# Altium PCB Mega2560PCB.PcbDoc (part 1 of 2)
Units mil, origin at the board's own origin, x right, y up, seen from the top; angles counter-clockwise.
Board outline 3543.31 x 2165.35 mil, 4 copper layers (Top Layer, GND02, PWR03, Bottom Layer), stack 23.756 mil thick; 55 components, 99 nets, 321 pads, 155 vias.
Unrouted connection lines stored in the file: 47.
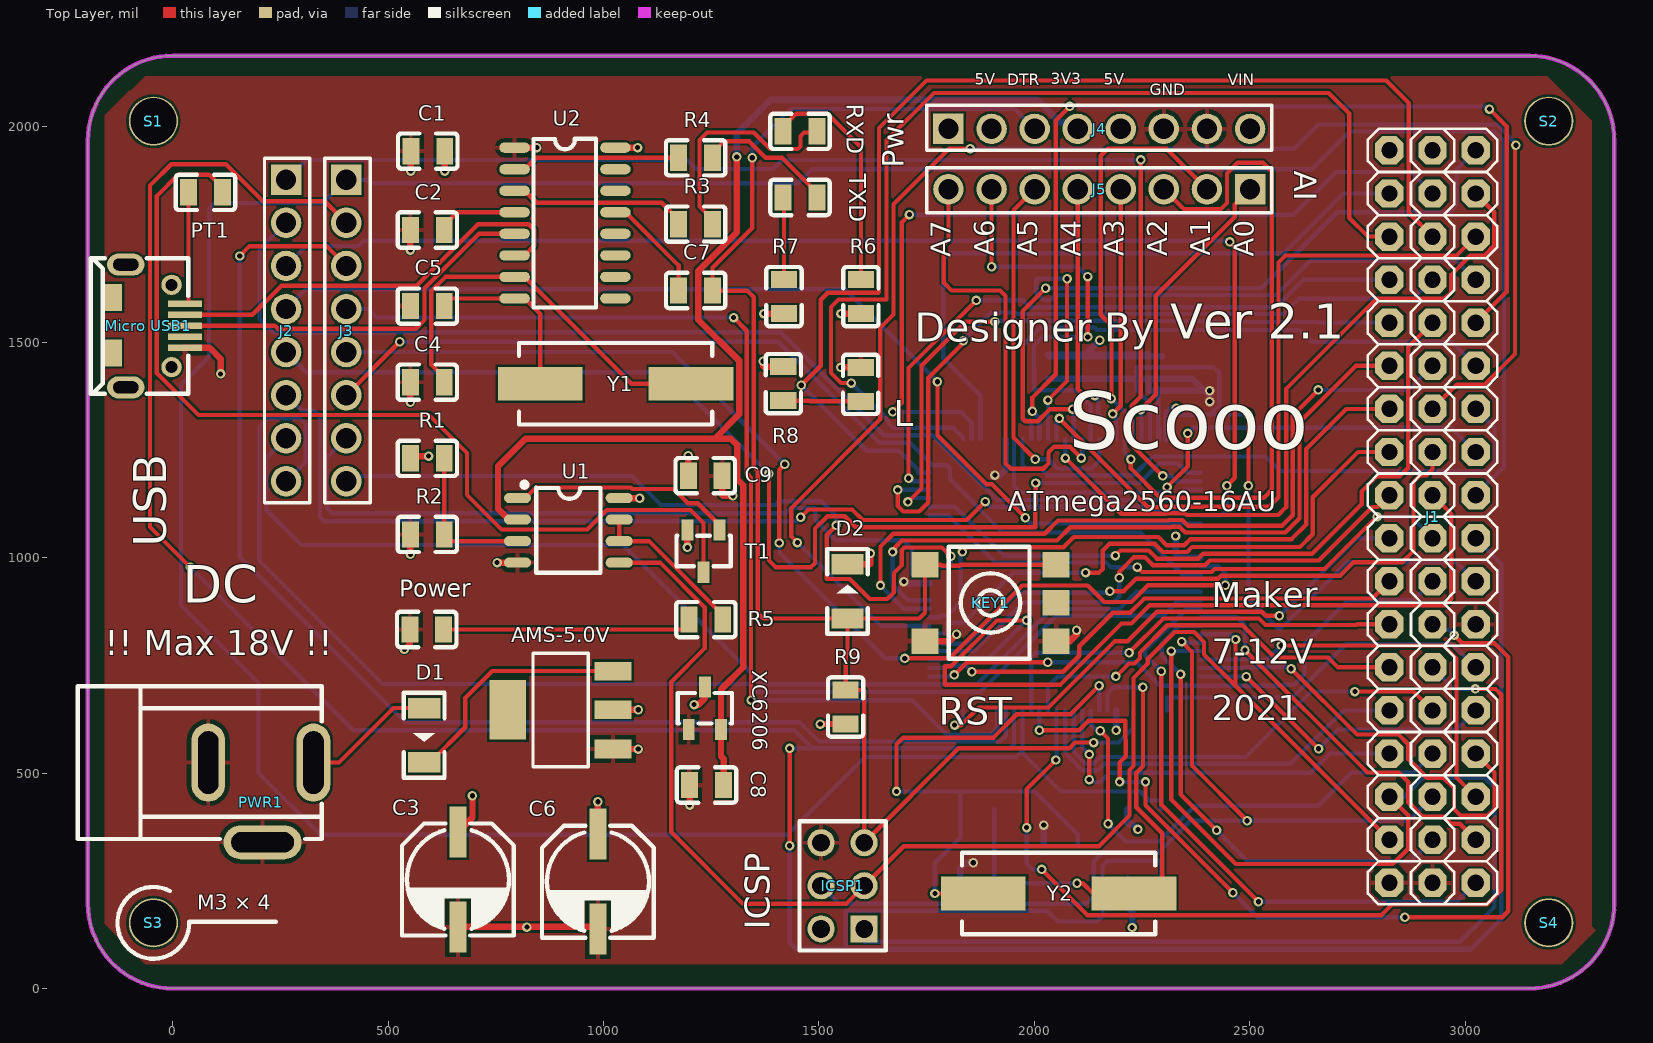
[diagram p0: Top Layer view]
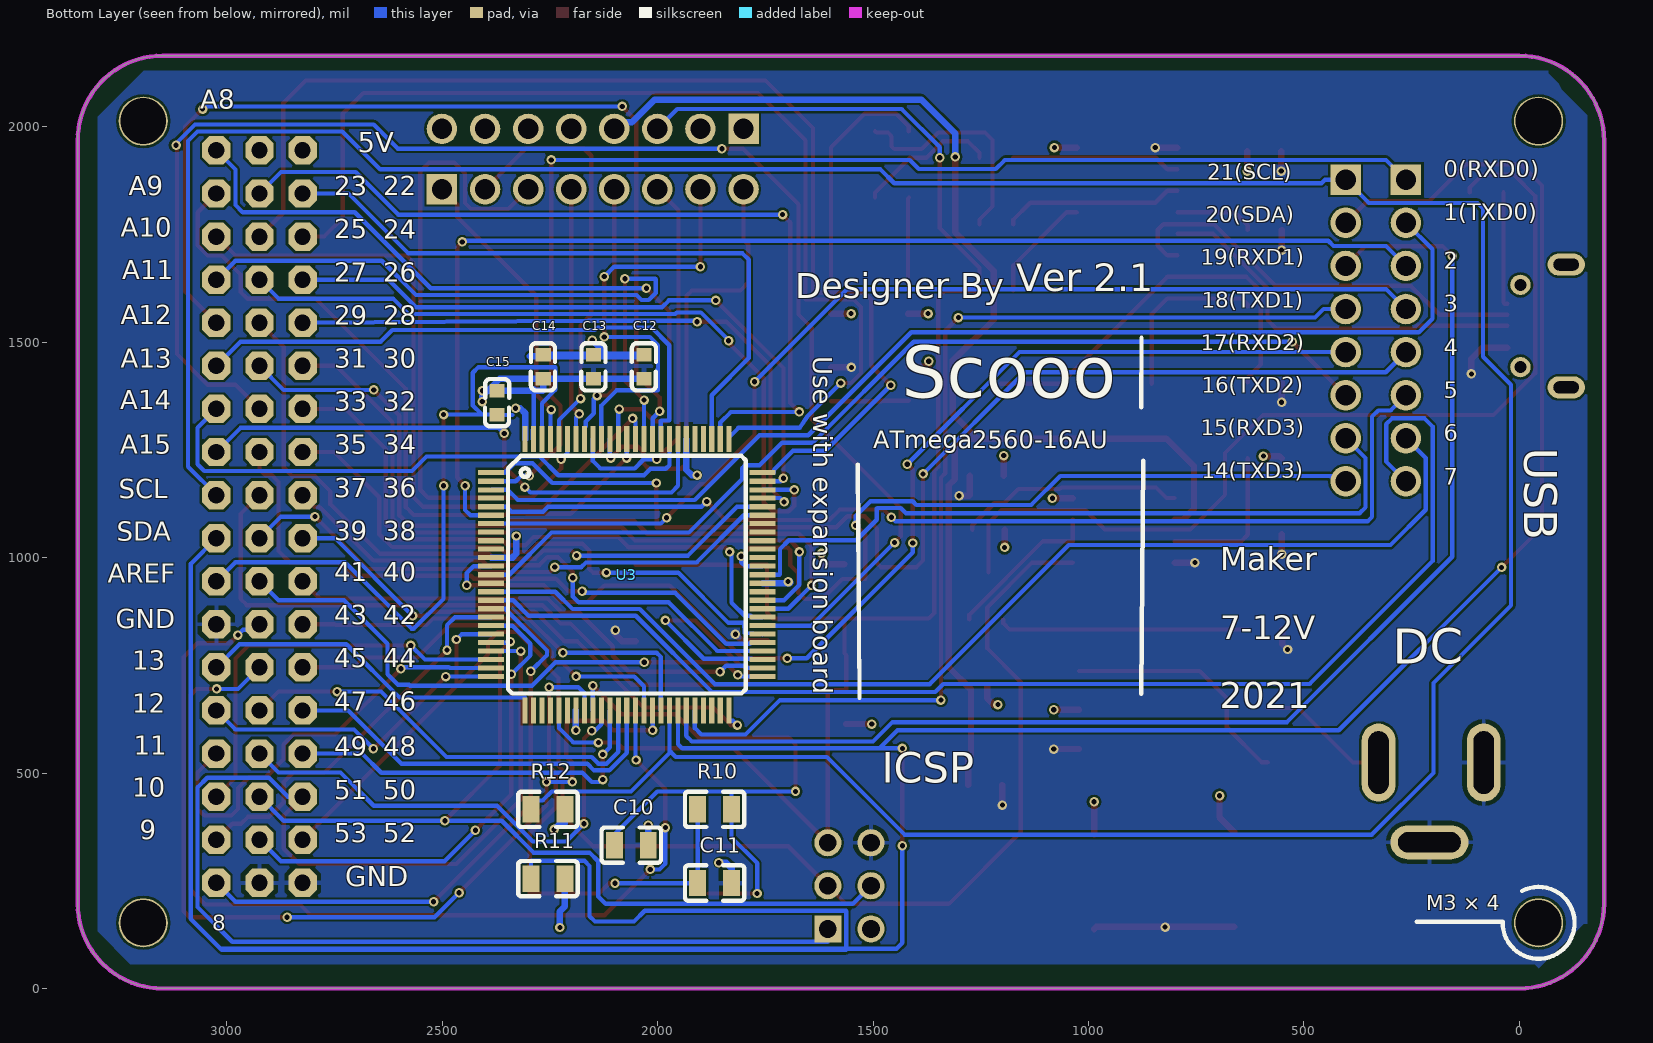
[diagram p1: Bottom Layer view, seen from below]
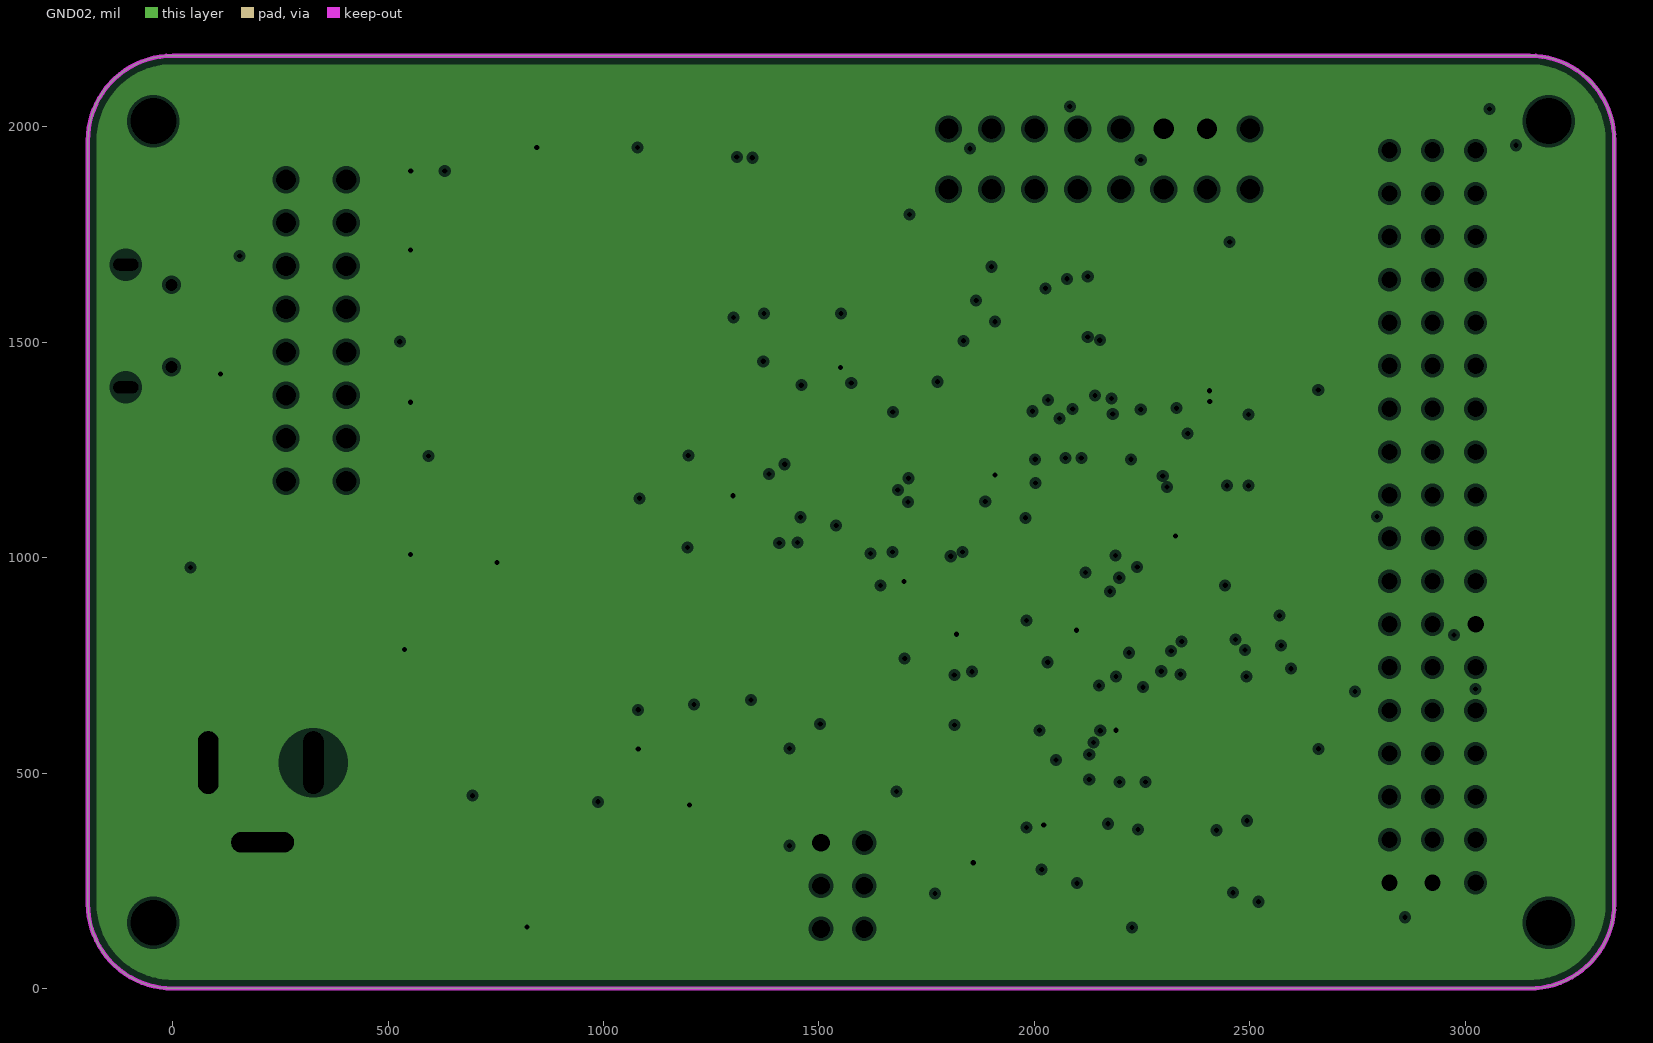
[diagram p2: GND02, clearances drawn from the general rule]
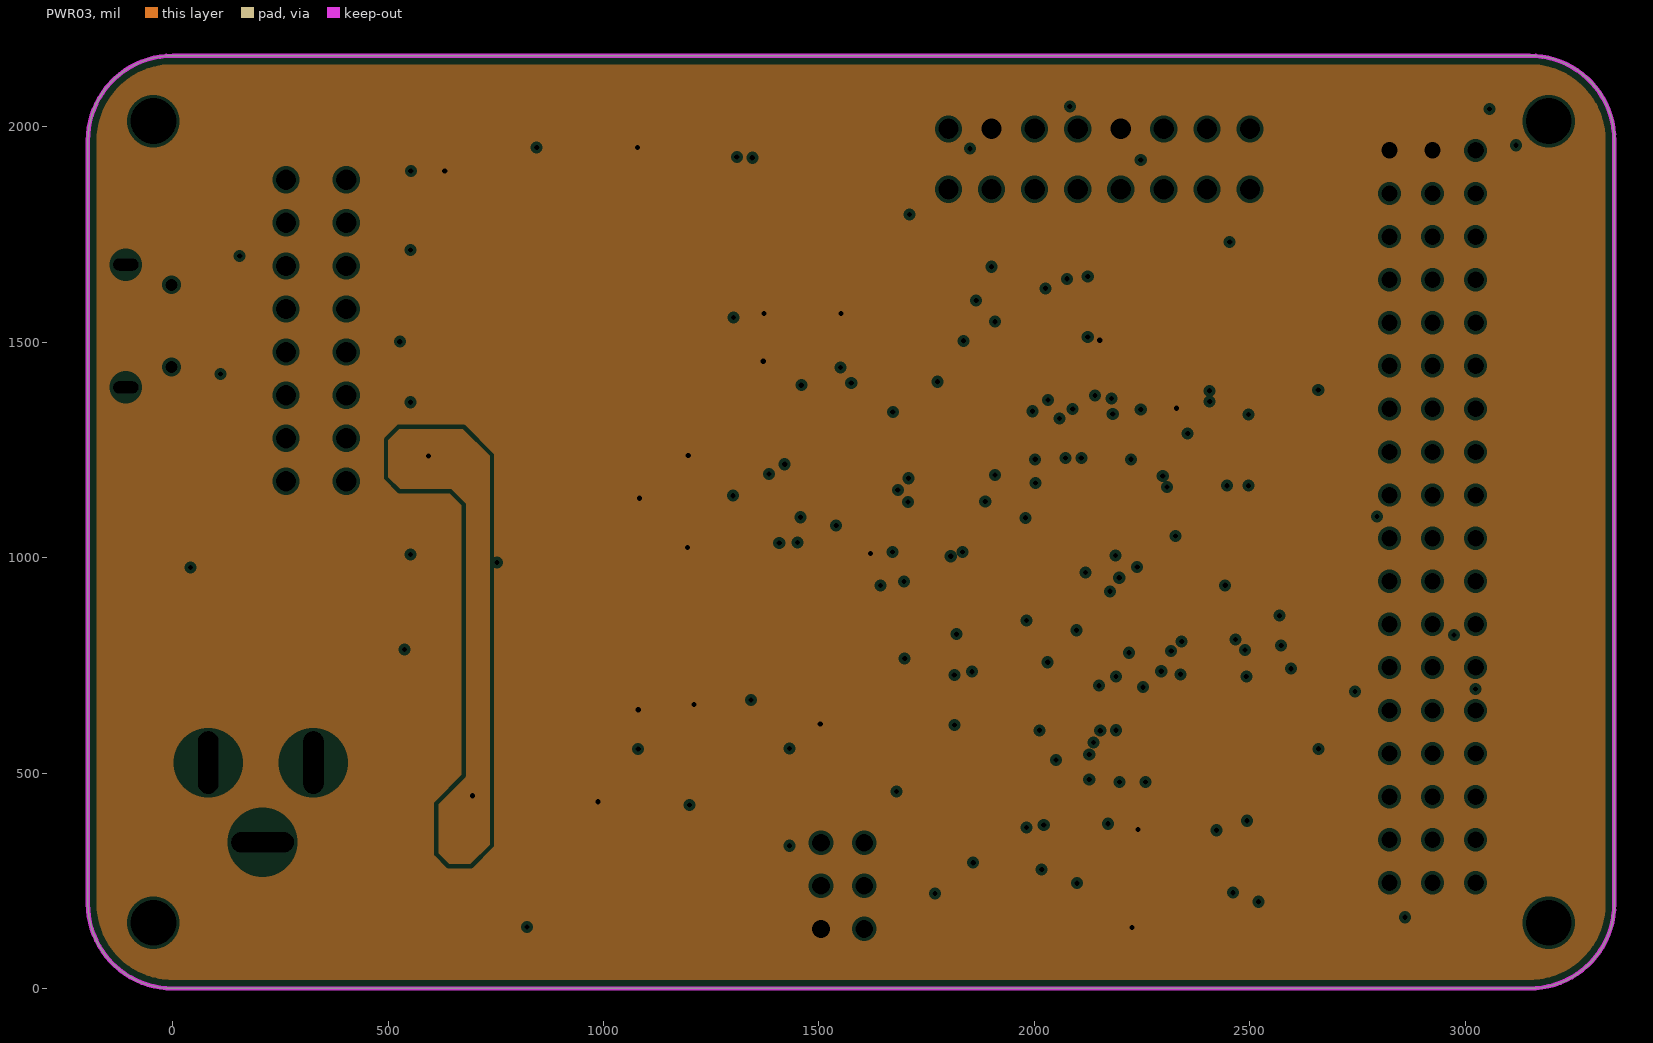
[diagram p3: PWR03, clearances drawn from the general rule]

## Layer stack, top to bottom
Top Solder: solder mask 0.4, Solder Resist, Dk 3.5
Top Layer: signal copper 1.4
Dielectric 2: prepreg 2.8, PP-006, Dk 4.1
GND02: plane copper 1.378, net GND
Dielectric 1: dielectric 12.6, FR-4, Dk 4.8
PWR03: plane copper 1.378, net +5V
Dielectric 3: prepreg 2.8, PP-006, Dk 4.1
Bottom Layer: signal copper 1.4
Bottom Solder: solder mask 0.4, Solder Resist, Dk 3.5

## Board outline
0,0 cw(c0,196.85) -196.85,196.85 -196.85,1968.5 cw(c0,1968.5) 0,2165.35 3149.61,2165.35 cw(c3149.61,1968.5) 3346.46,1968.5 3346.46,196.85 cw(c3149.61,196.85) 3149.61,0

## Design rules (kind name [scope] priority, off if disabled: settings)
Clearance [All] p1: gap=5.5 ignorepadtopadclearanceinfootprint=FALSE
HoleSize [All] p1: absolutevalues=TRUE maxlimit=248.03 minlimit=7.87 maxpercent=80.000 minpercent=20.000
PlaneClearance [All] p1: clearance=8
PlaneConnect [All] p1: planeconnectstyle=Relief reliefexpansion=20 reliefentries=4 reliefconductorwidth=10 reliefairgap=10
PolygonConnect [All] p1: thpad.connectstyle=Relief thpad.reliefconductorwidth=10 thpad.reliefentries=4 thpad.polygonreliefangle="90 Angle" thpad.airgapwidth=10 smdpad.connectstyle=Relief smdpad.reliefconductorwidth=10 smdpad.reliefentries=4 smdpad.polygonreliefangle="90 Angle" smdpad.airgapwidth=10 via.connectstyle=Direct via.reliefconductorwidth=10 via.reliefentries=4 via.polygonreliefangle="90 Angle" via.airgapwidth=10
RoutingVias [All] p1: holewidth=12 width=22 viastyle="Through Hole" minholewidth=12 minwidth=22 maxholewidth=12 maxwidth=22
SilkToSilkClearance [All] p1: silktosilkclearance=2
SilkToSolderMaskClearance [IsPad] p1: minsilkscreentomaskgap=2 clearancetoexposedcopper=TRUE
SolderMaskExpansion [All] p1: expansion=4 istentingtop=FALSE
Width PWR [InNetClass('PWR')] p1: maxlimit=60 minlimit=15 preferedwidth=15
Width [All] p2: maxlimit=15 minlimit=6 preferedwidth=10
25 further rules are at their usual default settings.

## Classes and differential pairs
net class PWR: +3V3 +5V GND VIN

## Components (designator, comment, footprint, x,y, rotation, side; value= is the part's Value field where it differs from the comment)
AMS-5.0V "AMS1117-5.0" AMS1117-5.0V 900.1,646.4 r0 top locked (schematic designator AMS1)
C1 "0.1uF" 0805 592.1,1943.8 r0 top locked
C2 "0.1uF" 0805 591,1760.7 r0 top locked
C3 "100uF 35V" 极性电容 657.15,257.37 r270 top locked
C4 "22pF" 0805 591,1407.33 r0 top locked
C5 "22pF" 0805 591,1584.02 r0 top locked
C6 "100uF 35V" 极性电容 982.15,252.37 r270 top locked
C7 "0.1uF" 0805 1213.8,1620.3 r180 top locked
C8 "0.1pF" 0805 1239.31,472.4 r0 top locked
C9 "0.1uF" 0805 1236.21,1190.4 r0 top locked
C10 "22pF" 0805 2061.37,332.8 r180 bottom locked
C11 "22pF" 0805 1867.87,244.8 r180 bottom locked
C12 "100nF-0603" 0603_CAP 2031.73,1443.06 r90 bottom locked
C13 "100nF-0603" 0603_CAP 2148.86,1443.06 r90 bottom locked
C14 "100nF-0603" 0603_CAP 2265.98,1443.06 r90 bottom locked
C15 "100nF-0603" 0603_CAP 2373.2,1359.8 r270 bottom locked
D1 "二极管" "1206 正负" 583.8,587.9 r90 top locked
D2 "二极管" "1206 正负" 1566.42,921.95 r270 top locked
ICSP1 "ICSP" "排针 2*3 PIN" 1555.1,238.4 r90 top locked
J1 "Header 3*18" "排针 3*18 PIN" 2874.41,1095.38 r0 top locked
J2 "Header 8" "排针 8 PIN" 263.15,1527.27 r270 top locked
J3 "Header 8" "排针 8 PIN" 403.15,1527.27 r270 top locked
J4 "Header 8" "排针 8 PIN" 2150.79,1995.38 r0 top locked
J5 "Header 8" "排针 8 PIN" 2150.79,1855.38 r180 top locked
KEY1 "按键" 按键 1898.5,895.1 r0 top locked
L "LED" "0805 - LED" 1597,1402.3 r90 top locked
"Micro USB1" "Micro USB" MICRO-USB -56.59,1537.88 r270 top locked
Power "LED" "0805 - LED" 589.7,833.4 r180 top locked
PT1 "500MA" 0805 76,1848 r0 top locked
PWR1 "PWR" DC电源 204.6,431.84 r0 top locked
R1 "10K" 0805 591,1230.67 r180 top locked
R2 "10K" 0805 591,1054 r0 top locked
R3 "1K" 0805 1213.8,1774.3 r0 top locked
R4 "1K" 0805 1213.8,1928.32 r0 top locked
R5 "10K" 0805 1237.5,856.4 r180 top locked
R6 "1K" 0805 1597.61,1606.02 r270 top locked
R7 "1K" 0805 1418.98,1606.02 r270 top locked
R8 "1K" 0805 1417.38,1404 r90 top locked
R9 "10K" 0805 1562,653.3 r270 top locked
R10 "1M" 0805 1867.87,415.8 r0 bottom locked
R11 "10K" 0805 2254.87,254.8 r180 bottom locked
R12 "10K" 0805 2254.87,415.8 r180 bottom locked
RXD "LED" "0805 - LED" 1456.3,1989.7 r0 top locked
S1 "散热孔" 散热孔 -44.85,2013.37 r0 top locked
S2 "散热孔" 散热孔 3194.15,2013.37 r0 top locked
S3 "散热孔" 散热孔 -44.85,152.37 r0 top locked
S4 "散热孔" 散热孔 3194.15,152.37 r0 top locked
T1 "MOSFET-P" SI2301 1232.3,1015.4 r90 top locked
TXD "LED" "0805 - LED" 1456.1,1836.2 r0 top locked
U1 "LM358" LM358 918.4,1063.5 r270 top locked
U2 "CH340G" CH340G 910.6,1776.8 r180 top locked
U3 "ATmega2560-16AU" ATMEGA2560-AU 2071.7,960.4 r180 bottom locked
XC6206 "XC6206P332" XC6206P332-3.3V 1235.4,650.4 r270 top locked (schematic designator XC1)
Y1 "12M" 贴片晶振 1028.2,1403.8 r180 top locked
Y2 "16M" 贴片晶振 2056.7,220.5 r0 top locked

## Footprints (in the part's own frame and the unit in brackets; to place one, negate y for a bottom-side part, rotate by r counter-clockwise, add the part's x,y. Pads: shape width x height; smd on the part's side, far side on the other; paste and mask are expansions set on the pad)
0603_CAP [mm]
  rect 0.8x0.9 smd: 1(-0.7,0) 2(0.7,0)
  silkscreen extent -1.4,-0.7 1.4,0.72, body extent -0.8,-0.41 0.8,0.41, height 0.45
0805 [mm]
  rect 1x1.55 smd: 1(-1,0) 2(1,0)
  silkscreen extent -1.75,-1.04 1.75,1.04, body extent -1,-0.62 1,0.62, height 0.5
"0805 - LED" [mm]
  rect 1x1.55 smd: 1(-1,0) 2(1,0)
  silkscreen extent -1.75,-1.04 1.75,1.04, body extent -1,-0.62 1,0.62, height 0.5
"1206 正负" [mm] "开关二极管"
  rect 1.2x1.9 smd: 1(1.6,0) 2(-1.6,0)
  silkscreen extent -2.5,-1.2 2.5,1.2, body extent -1.6,-0.8 1.6,0.8, height 0.55
AMS1117-5.0V [mil]
  rect 85x43 smd: 1(122,-90.5) 2(122,0.5) 3(122,90.5)
  rect 85x138 smd: 4(-122,0.5)
  silkscreen extent -64,-132 64,132, body extent -138,-132 138,132, height 71
ATMEGA2560-AU [mil] "主控芯片"
  rect 60x12 smd: 1(-314.98,236.98) 2(-314.98,216.98) 3(-314.98,196.98) 4(-314.98,177.98) 5(-314.98,157.98) 6(-314.98,137.98) 7(-314.98,118.98) 8(-314.98,98.98) 9(-314.98,78.98) 10(-314.98,59.98) 11(-314.98,39.98) 12(-314.98,19.98) 13(-314.98,-0.02) 14(-314.98,-19.7) 15(-314.98,-39.39) 16(-314.98,-59.07) 17(-314.98,-78.76) 18(-314.98,-98.44) 19(-314.98,-118.13) 20(-314.98,-137.81) 21(-314.98,-157.5) 22(-314.98,-177.18) 23(-314.98,-196.87) 24(-314.98,-216.55) 25(-314.98,-236.24) 51(314.98,-236.24) 52(314.98,-216.55) 53(314.98,-196.87) 54(314.98,-177.18) 55(314.98,-157.5) 56(314.98,-137.81) 57(314.98,-118.13) 58(314.98,-98.44) 59(314.98,-78.76) 60(314.98,-59.07) 61(314.98,-39.39) 62(314.98,-19.7) 63(314.98,-0.02) 64(314.98,19.98) 65(314.98,39.98) 66(314.98,59.98) 67(314.98,78.98) 68(314.98,98.98) 69(314.98,118.98) 70(314.98,137.98) 71(314.98,157.98) 72(314.98,177.98) 73(314.98,196.98) 74(314.98,216.98) 75(314.98,236.98)
  rect 12x60 smd: 26(-236.24,-314.98) 27(-216.56,-314.98) 28(-196.87,-314.98) 29(-177.19,-314.98) 30(-157.5,-314.98) 31(-137.82,-314.98) 32(-118.13,-314.98) 33(-98.45,-314.98) 34(-78.76,-314.98) 35(-59.08,-314.98) 36(-39.39,-314.98) 37(-19.71,-314.98) 38(-0.02,-314.98) 39(19.98,-314.98) 40(39.98,-314.98) 41(59.98,-314.98) 42(78.98,-314.98) 43(98.98,-314.98) 44(118.98,-314.98) 45(137.98,-314.98) 46(157.98,-314.98) 47(177.98,-314.98) 48(196.98,-314.98) 49(216.98,-314.98) 50(236.98,-314.98) 76(236.98,314.98) 77(216.98,314.98) 78(196.98,314.98) 79(177.98,314.98) 80(157.98,314.98) 81(137.98,314.98) 82(118.98,314.98) 83(98.98,314.98) 84(78.98,314.98) 85(59.98,314.98) 86(39.98,314.98) 87(19.98,314.98) 88(-0.02,314.98) 89(-19.71,314.98) 90(-39.39,314.98) 91(-59.08,314.98) 92(-78.76,314.98) 93(-98.45,314.98) 94(-118.13,314.98) 95(-137.82,314.98) 96(-157.5,314.98) 97(-177.19,314.98) 98(-196.87,314.98) 99(-216.56,314.98) 100(-236.24,314.98)
  silkscreen extent -276,-276 276,276, body extent -315,-315 315,315, height 47
CH340G [mil]
  oval 70.79x23.62 smd: 1(117,-175) 2(117,-125) 3(117,-75) 4(117,-25) 5(117,25) 6(117,75) 7(117,125) 8(117,175) 9(-117,175) 10(-117,125) 11(-117,75) 12(-117,25) 13(-117,-25) 14(-117,-75) 15(-117,-125) 16(-117,-175)
  silkscreen extent -72,-196 73,196, body extent -123,-197 123,197, height 59
DC电源 [mm]
  oval 2x4.6 hole 1.2 slot 3.7 at 90 deg: 1(3.1,2.35) 2(-3.1,2.35)
  oval 4.6x2 hole 1.2 slot 3.7 at 0 deg: 3(0.1,-2.35)
  silkscreen extent -10.8,-2.15 3.6,6.85, body extent -10.72,-2.65 3.1,6.85, height 11.2
LM358 [mm]
  oval 0.6x1.598 smd: 1(-1.905,-3) 2(-0.635,-3) 3(0.635,-3) 4(1.905,-3) 5(1.905,3) 6(0.635,3) 7(-0.635,3) 8(-1.905,3)
  silkscreen extent -2.84,-2.74 2.5,1.9, body extent -2.5,-3 2.5,3, height 1.8
MICRO-USB [mm]
  oval 1.3x2.199 hole 0.7 slot 1.5 at 90 deg: 0(-3.619,-1.329) 0(3.619,-1.329)
  round 1.2 hole 0.7: 0(-2.425,1.371) 0(2.425,1.371)
  rect 1.6x1.2 smd: 0(-1.683,-2.14) 0(1.596,-2.156)
  rect 0.4x2 smd: 1(-1.31,2.156) 2(-0.66,2.156) 3(-0.01,2.156) 4(0.64,2.156) 5(1.29,2.156)
  silkscreen extent -4,-3.4 4,2.36, body extent -3.98,-4.32 3.98,1.46, height 2.37
SI2301 [mm]
  rect 1.25x0.7 smd: 1(1.25,-0.95) 2(1.25,0.95) 3(-1.25,0)
  silkscreen extent -0.9,-1.6 0.9,1.6
XC6206P332-3.3V [mm]
  rect 1.25x0.7 smd: 1(1.25,-0.95) 2(1.25,0.95) 3(-1.25,0)
  silkscreen extent -0.9,-1.6 0.9,1.6
按键 [mm] "6*6"
  rect 1.6x1.5 smd: 1(-3.867,2.25) 2(3.867,2.25) 3(-3.867,-2.25) 4(3.867,-2.25) 5(3.867,0)
  silkscreen extent -2.46,-3.3 2.32,3.3
"排针 2*3 PIN" [mm]
  rect 1.6x1.6 hole 1.05: 1(-2.54,-1.27)
  round 1.6 hole 1.05: 2(-2.54,1.27) 3(0,-1.27) 4(0,1.27) 5(2.54,-1.27) 6(2.54,1.27)
  silkscreen extent -3.81,-2.54 3.81,2.54, body extent -3.81,-2.54 3.81,2.54, height 8.54
"排针 3*18 PIN" [mil]
  oct 66x66 hole 38: 1(-50,850) 2(50,850) 3(-50,750) 4(50,750) 5(-50,650) 6(50,650) 7(-50,550) 8(50,550) 9(-50,450) 10(50,450) 11(-50,350) 12(50,350) 13(-50,250) 14(50,250) 15(-50,150) 16(50,150) 17(-50,50) 18(50,50) 19(-50,-50) 20(50,-50) 21(-50,-150) 22(50,-150) 23(-50,-250) 24(50,-250) 25(-50,-350) 26(50,-350) 27(-50,-450) 28(50,-450) 29(-50,-550) 30(50,-550) 31(-50,-650) 32(50,-650) 33(-50,-750) 34(50,-750) 35(-50,-850) 36(50,-850) 37(150,850) 38(150,750) 39(150,650) 40(150,550) 41(150,450) 42(150,350) 43(150,250) 44(150,150) 45(150,50) 46(150,-50) 47(150,-150) 48(150,-250) 49(150,-350) 50(150,-450) 51(150,-550) 52(150,-650) 53(150,-750) 54(150,-850)
  silkscreen extent -100,-900 200,900, body extent -100,-900 200,900, height 336
"排针 8 PIN" [mm]
  rect 1.8x1.8 hole 1.2: 1(-8.89,0)
  round 1.8 hole 1.2: 2(-6.35,0) 3(-3.81,0) 4(-1.27,0) 5(1.27,0) 6(3.81,0) 7(6.35,0) 8(8.89,0)
  silkscreen extent -10.16,-1.27 10.16,1.4, body extent -10.16,-1.27 10.16,1.27, height 8.54
散热孔 [mm]
  round 2.9 hole 2.7: 1(0,0)
极性电容 [mm]
  rect 3x1 smd: 1(-2.691,0.124) 2(2.909,0.124)
  silkscreen extent -3.19,-3.18 3.41,3.42
贴片晶振 [mm] "OSC-SMD_L11.5-W4.8-P9.50"
  rect 5x2 smd: 1(-4.445,0) 2(4.445,0)
  silkscreen extent -5.7,-2.4 5.7,2.4

## Part data
C1 C2 C4 C5 C7 C9 C10 C11: library part CAP
C3 C6: library part "Cap Pol极性电容", "极性电容器", LatestRevisionDate=17-Jul-2002, LatestRevisionNote="Re-released for DXP Platform.", PackageDescription="Polarized Capacitor (Radial); 2 Leads", PackageReference=RB7.6-15, Published=8-Jun-2000, Publisher="Altium Limited"
C8: library part CAP电容
C12 C13 C14 C15: library part CAP-0603, "0603 50V"
ICSP1: library part "Header 2*3", "排针"
J2 J3 J4 J5: "排针"
KEY1: "Switch", LatestRevisionDate=17-Jul-2002, LatestRevisionNote="Re-released for DXP Platform.", PackageDescription="Switch; 2 Leads", PackageReference=SPST-2, Published=24-Mar-1999, Publisher="Altium Limited"
PT1: library part PT, "磁珠"
R1 R2 R3 R4 R5 R6 R7 R8 R9 R10: library part RES
R11 R12: library part 电阻
T1: library part MOSFET-P(MOS), "摩斯管", LatestRevisionDate=17-Jul-2002, LatestRevisionNote="Re-released for DXP Platform.", PackageDescription="TO, Flat Index; 3 In-Line, Axial Leads; Body Dia. 4.6mm; Lead Dia. 0.5 mm (max)", PackageReference=E3, PackageVersion=1995/1996, Published=8-Jun-2000, Publisher="Altium Limited"
U1: "电源控制"
U3: "8-bit AVR Microcontroller, 4.5-5.5V, 16MHz, 256KB Flash, 4KB EEPROM, 8KB SRAM, 86 GPIO pins, 100-pin TQFP, Industrial Grade (-40°C to 85°C), Pb-Free", Code_JEDEC=MS-026-AED, ComponentLink1Description="Manufacturer URL", ComponentLink1URL=http://www.atmel.com/, ComponentLink2Description="ATmega640/1280/1281/2560/2561 Datasheet", ComponentLink2URL=http://www.atmel.com/dyn/resources/prod_documents/doc2549.pdf, ComponentLink3Description="ATmega640/1280/1281/2560/2561 Summary", ComponentLink3URL=http://www.atmel.com/dyn/resources/prod_documents/2549S.pdf, DatasheetVersion="revN, May-2011", PackageDescription="100-Pin Thin Profile Plastic Quad Flat Pack (TQFP), 14 x 14 x 1.0 mm Body, 0.5 mm Pitch", PackageReference=100A, PackageVersion="revD, Oct-2010"
Y1 Y2: library part CRYSTAL

## Via types
v1: diameter 22, hole 12, Top Layer to Bottom Layer, tented both sides, 155 vias

## Nets (pads, with @x,y where several pads share a name; then routed paths per layer and width w, separated by ;. In a path a pad name is that pad's centre, name@x,y a point inside that pad or via, vN(x,y) a via of type N, cw(c..) or ccw(c..) an arc to the next point about the centre after c; other vN are vias at no path point)
+3V3: C8.2 J4.4 U1.2 XC6206.2 | length 3221.2
  Top Layer w15: U1.2@800.29,1088.5 780.02,1088.5 755.15,1113.37 755.15,1212.37 819.15,1276.37 1258.15,1276.37 ; C8.2@1278.68,472.4 1278.68,533.37 1272.8,539.25 XC6206.2@1272.8,601.2 1272.8,694.14 1324.58,745.92 1324.58,1167.89 1310.15,1182.32 1310.15,1261.87 1295.65,1276.37 1258.15,1276.37 ; v1(1309.5,1930.3) 1309.5,1755.01 1220.15,1665.66 1220.15,1552.37 1314.63,1457.89 1314.63,1332.85 1258.15,1276.37
  Bottom Layer w15: v1(1309.5,1930.3) 1309.5,1984.72 1388.15,2063.37 2007.15,2063.37 2059.88,2010.64 2070.41,2010.64 2085.67,1995.38 J4.4@2100.79,1995.38
+5V: AMS-5.0V.2 C1.2 C6.1 C9.1 C12.2 C13.2 C14.2 D2.2 ICSP1.2 J1.1 J1.2 J4.2 J4.5 R6.2 R7.2 R8.2 R9.2 R11.2 R12.2 T1.2 U1.8 U2.16 U3.100 XC6206.3 | length 1525
  Top Layer w15: v1(631.47,1897.29) C1.2@631.47,1943.8 ; C6.1@987.05,358.32 v1(987.05,433.37) ; AMS-5.0V.2@1022.1,646.9 v1(1080.6,646.9) ; U2.16@1027.6,1951.8 v1(1078.99,1951.8) ; U1.8@1036.51,1138.5 1036.86,1138.15 1083.62,1138.15 v1(1083.97,1137.8) ; v1(1194.9,1023.99) T1.2@1194.9,1064.6 ; C9.1@1196.84,1190.4 v1(1196.84,1236.91) ; v1(1210.4,658.99) 1220.65,658.99 1235.4,673.74 XC6206.3@1235.4,699.6 ; v1(1370.87,1455.87) 1370.87,1444.37 1371.87,1443.37 R8.2@1417.38,1443.37 ; v1(1372.47,1566.65) R7.2@1418.98,1566.65 ; v1(1502.99,613.93) R9.2@1562,613.93 ; v1(1551.1,1566.65) R6.2@1597.61,1566.65 ; D2.2@1566.42,984.95 1618.4,984.95 1619.83,986.37 v1(1619.83,1009.95)
  Bottom Layer w15: C12.2@2031.73,1470.61 2092.89,1470.61 2117.89,1470.61 ; C12.2@2034.25,1468.1 2296.7,1468.1 ; v1(2152.15,1504.87) 2117.89,1470.61 ; R11.2@2215.5,254.8 2215.5,190.36 2227.15,178.71 v1(2227.15,141.57) ; R12.2@2215.5,415.8 2215.5,383.37 2216.75,382.12 2227.67,382.12 v1(2240.5,369.29) ; C14.2@2265.98,1470.61 C13.2@2148.86,1470.61 2117.89,1470.61 ; U3.100@2307.94,1275.38 2307.94,1335.89 2319.15,1347.1 v1(2329.96,1347.1)
AREF: C15.2 J1.47 U3.98 | length 1708.1
  Top Layer w10: v1(2497.15,1167.1) v1(2497.15,1332.24)
  Bottom Layer w10: U3.98@2268.57,1275.38 2268.57,1299.87 2268.65,1299.95 2268.65,1358.65 2237.15,1390.15 2237.15,1441.37 2238.15,1442.37 2416.15,1442.37 2429.15,1429.37 2429.15,1353.24 2408.15,1332.24 ; 2337.46,1331.04 C15.2@2373.2,1331.04 ; C15.2@2373.2,1332.24 2408.15,1332.24 ; v1(2497.15,1167.1) 2497.15,904.37 2566.15,835.37 2571.73,835.37 2725.73,989.37 2980.42,989.37 J1.47@3024.41,945.38 ; v1(2497.15,1332.24) 2408.15,1332.24
DTR: C7.1 D2.1 ICSP1.5 J4.3 KEY1.1 KEY1.2 R9.1 U3.30 | length 4078.8
  Top Layer w10: v1(1345.5,1928.4) 1345.5,1765.22 1253.17,1672.89 C7.1@1253.17,1620.3 1253.17,1619.37 1334.15,1619.37 1349.15,1604.37 1349.15,1210.32 1358.08,1201.39 1358.08,871.53 1370.65,858.96 D2.1@1566.42,858.96 ; KEY1.2@2050.74,983.68 1828.61,983.68 1825.92,980.99 1785.61,980.99 1782.92,983.68 KEY1.1@1746.26,983.68 1746.26,872.07 1733.15,858.96 D2.1@1566.42,858.96 ; v1(2137.6,570.9) 2094.81,570.9 2081.51,557.61 1824.31,557.61 ICSP1.5@1605.1,338.4 1605.1,691.37 1603.8,692.67 R9.1@1562,692.67 1562,773.37 1566.42,777.79 D2.1@1566.42,858.96
  Bottom Layer w10: v1(1345.5,1928.4) 1345.5,1953.1 1433.77,2041.37 1954.8,2041.37 J4.3@2000.79,1995.38 ; v1(2137.6,570.9) 2195.73,570.9 2229.2,604.37 U3.30@2229.2,645.42
GND: "Micro USB1.5" AMS-5.0V.1 C1.1 C2.1 C3.2 C4.1 C5.1 C6.2 C8.1 C9.2 C10.2 C11.2 C12.1 C13.1 C14.1 C15.1 ICSP1.6 J1.35 J1.36 J1.48 J4.6 J4.7 KEY1.3 KEY1.4 L.2 Power.2 PWR1.2 PWR1.3 R2.1 U1.4 U2.1 U3.11 U3.32 U3.62 U3.81 U3.99 XC6206.1 | length 2432.9
  Top Layer w15: 28.29,1487.11 86.14,1487.11 111.2,1462.05 v1(111.2,1426.7) ; v1(537.83,786.89) 550.33,799.39 Power.2@550.33,833.4 ; v1(551.63,1007.49) R2.1@551.63,1054 ; v1(551.63,1360.82) C4.1@551.63,1407.33 ; v1(551.63,1714.18) C2.1@551.63,1760.7 ; v1(552.73,1897.29) C1.1@552.73,1943.8 ; C3.2@662.05,142.84 v1@821.68,142.84 ; v1(752.83,988.5) U1.4@800.29,988.5 ; U2.1@793.6,1951.8 v1(844.99,1951.8) ; v1(822.15,142.37) v1@821.68,142.84 ; C6.2@987.05,137.84 982.05,142.84 v1@821.68,142.84 ; AMS-5.0V.1@1022.1,555.9 v1(1080.6,555.9) ; v1(1199.94,425.89) C8.1@1199.94,472.4 ; C9.2@1275.58,1190.4 1275.58,1145.37 1277.06,1143.89 v1(1300.58,1143.89) ; v1(1550.49,1441.67) L.2@1597,1441.67 ; KEY1.3@1746.26,806.52 1803.62,806.52 v1(1819.47,822.37) ; KEY1.4@2050.74,806.52 2083.15,806.52 2098.24,821.61 v1(2098.24,831.52)
  Bottom Layer w10: U3.99@2287.44,1275.38 U3.99@2287.44,1297.07 ; 2287.44,1394.04 2287.44,1387.36 U3.99@2287.44,1297.07 ; U3.99@2288.26,1275.38 2289.92,1275.38 2289.92,1297.07 U3.99@2287.44,1297.07
  Bottom Layer w15: v1(1697.5,944.64) 1693.15,944.64 1692.07,943.57 1692.07,941.77 1693.15,940.7 U3.62@1756.72,940.7 ; C11.2@1828.5,244.8 1828.5,279.74 1840.8,292.03 v1(1858.15,292.03) ; v1(1908.72,1191.88) 1921.22,1191.88 1933.72,1204.38 U3.81@1933.72,1275.38 ; C10.2@2022,332.8 v1(2022,379.31) ; C13.1@2148.86,1415.5 C12.1@2031.73,1415.5 C14.1@2265.98,1415.5 ; v1(2189.83,599.42) U3.32@2189.83,645.42 ; v1(2328.18,1050.38) 2328.18,1009.17 2336.97,1000.38 U3.11@2386.68,1000.38 ; v1(2406.92,1387.36) 2394.66,1387.36 ; v1(2407.15,1362.37) 2407.15,1374.87 2394.66,1387.36 ; C14.1@2265.98,1415.5 2366.52,1415.5 2394.66,1387.36 ; C14.1@2265.98,1415.5 2265.98,1388.37 2266.99,1387.36 2287.44,1387.36 C15.1@2373.2,1387.36 2394.66,1387.36
MRX: R4.2 TXD.2 | length 325.1
  Top Layer w10: R4.2@1253.17,1928.32 1253.17,1939.89 1279.65,1966.37 1338.15,1966.37 1376.2,1928.32 1414.18,1928.32 1495.47,1847.03 TXD.2@1495.47,1836.2
MTX: R3.2 RXD.2 | length 534.5
  Top Layer w10: R3.2@1253.17,1774.3 1253.17,1785.13 1222.99,1815.31 1222.99,1969.59 1240.34,1986.94 1348.95,1986.94 1387.21,1948.69 1451.24,1948.69 1457.1,1954.55 1457.1,1978.4 1465.5,1986.8 1492.77,1986.8 RXD.2@1495.67,1989.7
NetAMS-5.0V_3: AMS-5.0V.3 D1.2 | length 565.8
  Top Layer w10: D1.2@583.8,524.91 597.58,524.91 678.98,606.31 678.98,674.13 741.75,736.9 AMS-5.0V.3@1022.1,736.9
NetC2_2: C2.2 U2.4 | length 186.6
  Top Layer w10: C2.2@630.37,1760.7 630.37,1771.52 660.65,1801.8 U2.4@793.6,1801.8
NetC4_2: C4.2 U2.7 Y1.1 | length 943.4
  Top Layer w10: C4.2@630.37,1407.33 630.37,1418.16 600.19,1448.34 600.19,1618.88 633.1,1651.8 U2.7@793.6,1651.8 817.18,1651.8 1065.18,1403.8 Y1.1@1203.2,1403.8
NetC5_2: C5.2 U2.8 Y1.2 | length 408.9
  Top Layer w10: C5.2@630.37,1584.02 630.37,1587.11 645.06,1601.8 U2.8@793.6,1601.8 817.18,1601.8 853.2,1565.78 Y1.2@853.2,1403.8
NetC7_2: C7.2 U2.13 | length 256.1
  Top Layer w10: U2.13@1027.6,1801.8 1051.18,1801.8 1174.43,1678.55 C7.2@1174.43,1620.3
NetC10_1: C10.1 R10.1 U3.34 Y2.1 | length 1554.4
  Top Layer w10: v1(1680.15,457.37) 1680.15,566.87 1695.65,582.37 1905.15,582.37 1959.15,636.37 2083.96,636.37 v1(2150.46,702.87) ; v1(1769.15,220.5) Y2.1@1881.7,220.5
  Bottom Layer w10: v1(1680.15,457.37) 1828.5,457.37 ; v1(1769.15,220.5) 1769.15,291.02 1828.5,350.37 R10.1@1828.5,415.8 1828.5,457.37 ; C10.1@2100.74,332.8 2100.74,357.78 2001.15,457.37 1828.5,457.37 ; U3.34@2150.46,645.42 v1(2150.46,702.87)
NetC11_1: C11.1 R10.2 U3.33 Y2.2 | length 1209.3
  Top Layer w10: v1(2099.15,244.37) 2112.28,244.37 2136.15,220.5 Y2.2@2231.7,220.5 2297.15,220.5 2297.15,360.37 2236.65,420.87 2236.65,500.37 2252.15,515.87 v1(2252.15,699.37)
  Bottom Layer w10: R10.2@1907.24,415.8 C11.1@1907.24,244.8 1907.24,244.37 v1(2099.15,244.37) ; U3.33@2170.15,645.42 2170.15,685.37 2184.15,699.37 v1(2252.15,699.37)
NetD1_1: D1.1 PWR1.1 | length 309.6
  Top Layer w10: PWR1.1@326.64,524.37 386.07,524.37 512.59,650.89 D1.1@583.8,650.89
NetJ2_1: J2.1 U3.2 | length 2886.6
  Top Layer w10: v1(2247.15,1923.37) 2247.15,1374.38 2225.65,1352.88 2225.65,1262.38 v1(2298.15,1189.88)
  Bottom Layer w10: J2.1@263.15,1877.27 309.25,1923.37 1194.15,1923.37 1215.15,1902.37 1394.15,1902.37 1415.15,1923.37 v1(2247.15,1923.37) ; v1(2298.15,1189.88) 2317.15,1189.88 2329.65,1177.38 U3.2@2386.68,1177.38
NetJ2_2: J2.2 U3.3 | length 2617
  Bottom Layer w10: J2.2@263.15,1777.27 201.72,1715.84 201.72,1554.8 233.15,1523.37 1411.36,1523.37 1650.52,1284.21 1763.85,1284.21 1914.18,1133.88 2324.59,1133.88 2348.09,1157.38 U3.3@2386.68,1157.38
NetJ2_3: J2.3 U3.6 | length 2916
  Top Layer w10: v1(2447.15,1167.1) 2465.5,1185.45 2465.5,1721.02 v1(2453.58,1732.94)
  Bottom Layer w10: J2.3@263.15,1677.27 309.25,1723.37 431.15,1723.37 443.46,1735.68 2450.84,1735.68 v1(2453.58,1732.94) ; U3.6@2386.68,1098.38 2434.65,1098.38 2447.15,1110.88 v1(2447.15,1167.1)
NetJ2_6: J2.6 U3.5 | length 2435
  Top Layer w10: v1(1457.65,1093.87) 1475.65,1111.87 1577.15,1111.87 1601.63,1087.39 1843.17,1087.39 v1(1886.15,1130.37)
  Bottom Layer w10: J2.6@263.15,1377.27 298.76,1341.67 327.54,1341.67 341.72,1327.49 341.72,1094.8 352.15,1084.37 1448.15,1084.37 v1(1457.65,1093.87) ; v1(1886.15,1130.37) 1898.14,1118.38 2254.64,1118.38 2266.15,1106.87 2340.15,1106.87 2351.66,1118.38 U3.5@2386.68,1118.38
NetJ5_1: J5.1 U3.97 | length 685.8
  Top Layer w10: v1(2247.15,1343.88) 2282.15,1378.88 2282.15,1607.96 2465.18,1790.99 2465.18,1819.78 J5.1@2500.79,1855.38
  Bottom Layer w10: v1(2247.15,1343.88) 2248.89,1342.14 U3.97@2248.89,1275.38
NetJ5_2: J5.2 U3.96 | length 981
  Top Layer w10: v1(2179.15,1369.37) 2179.15,1538.87 2154.15,1563.87 2154.15,1932.87 2170.65,1949.37 2306.8,1949.37 J5.2@2400.79,1855.38
  Bottom Layer w10: v1(2179.15,1369.37) 2229.2,1319.32 U3.96@2229.2,1275.38
NetJ5_3: J5.3 U3.95 | length 1538.7
  Top Layer w10: v1(2224.15,1228.37) 2224.15,1206.94 2291.89,1139.2 2533,1139.2 2551.4,1157.6 2551.4,1896.12 2530.82,1916.7 2472,1916.7 2447.15,1891.85 2447.15,1823.37 2433.15,1809.37 2346.8,1809.37 J5.3@2300.79,1855.38
  Bottom Layer w10: U3.95@2209.52,1275.38 2209.52,1243 v1(2224.15,1228.37)
NetJ5_4: J5.4 U3.94 | length 590.9
  Top Layer w10: v1(2182.15,1333.87) 2200.79,1352.51 J5.4@2200.79,1855.38
  Bottom Layer w10: v1(2182.15,1333.87) 2189.83,1326.19 U3.94@2189.83,1275.38
NetJ5_5: J5.5 U3.93 | length 623
  Top Layer w10: J5.5@2100.79,1855.38 2100.79,1391.87 2116.29,1376.37 v1(2140.73,1376.37)
  Bottom Layer w10: v1(2140.73,1376.37) 2148.13,1368.96 2148.13,1335.39 2167.15,1316.37 2167.15,1305.37 2170.15,1302.37 U3.93@2170.15,1275.38
NetJ5_6: J5.6 U3.92 | length 883.3
  Top Layer w10: J5.6@2000.79,1855.38 1951.75,1806.34 1951.75,1278.77 v1(2002.15,1228.37)
  Bottom Layer w10: v1(2002.15,1228.37) 2032.24,1228.37 2053.38,1207.23 2133.15,1207.23 2150.46,1224.54 U3.92@2150.46,1275.38
NetJ5_7: J5.7 U3.91 | length 1013.8
  Top Layer w10: v1(1900.79,1675.37) J5.7@1900.79,1855.38 ; v1(2124.15,1512.37) v1(2124.15,1652.37)
  Bottom Layer w10: v1(1900.79,1675.37) 2101.15,1675.37 v1(2124.15,1652.37) ; v1(2124.15,1512.37) 2018.15,1512.37 1999.15,1493.37 2000.15,1388.37 2095.65,1388.37 2130.78,1353.24 U3.91@2130.78,1275.38
NetJ5_8: J5.8 U3.90 | length 1039.3
  Top Layer w10: J5.8@1800.79,1855.38 1800.79,1738.01 1790.15,1727.37 1790.15,1638.37 1808.15,1620.37 1920.65,1620.37 1933.15,1607.87 1933.15,1218.87 1945.65,1206.37 2020.65,1206.37 2033.15,1218.87 2033.15,1244.87 2045.65,1257.37 2083.09,1257.37 v1(2109.15,1231.31)
  Bottom Layer w10: v1(2109.15,1231.31) 2111.09,1233.25 U3.90@2111.09,1275.38
NetL_1: L.1 R8.1 | length 180.3
  Top Layer w10: R8.1@1417.38,1364.63 1478.66,1364.63 1480.36,1362.93 L.1@1597,1362.93
"NetMicro USB1_1": "Micro USB1.1" PT1.1 | length 265.2
  Top Layer w10: 28.29,1589.47 33.76,1589.47 36.63,1592.35 PT1.1@36.63,1848
"NetMicro USB1_2": "Micro USB1.2" U2.6 | length 995.8
  Top Layer w10: 28.29,1563.88 184.8,1563.88 252.26,1631.34 566.06,1631.34 708.83,1774.11 826.42,1774.11 839.49,1761.04 839.49,1724.11 817.18,1701.8 U2.6@793.6,1701.8
"NetMicro USB1_3": "Micro USB1.3" U2.5 | length 902.4
  Top Layer w10: 28.29,1538.29 237.17,1538.29 244.12,1531.34 563.99,1531.34 584.69,1552.03 584.69,1625.3 634.54,1675.16 711.18,1751.8 U2.5@793.6,1751.8
NetPower_1: Power.1 R5.2 | length 583.5
  Top Layer w10: Power.1@629.07,833.4 1183.44,833.4 1198.13,848.09 R5.2@1198.13,856.4
NetR1_1: R1.1 R2.2 U1.3 | length 353.5
  Top Layer w10: R1.1@630.37,1230.67 R2.2@630.37,1054 630.37,1053.19 645.06,1038.5 U1.3@800.29,1038.5
NetR3_1: R3.1 U2.3 | length 419.3
  Top Layer w10: U2.3@793.6,1851.8 817.18,1851.8 844.87,1824.11 1135.45,1824.11 1174.43,1785.13 R3.1@1174.43,1774.3
NetR4_1: R4.1 U2.2 | length 391.8
  Top Layer w10: U2.2@793.6,1901.8 817.18,1901.8 843.7,1928.32 R4.1@1174.43,1928.32
NetR5_1: R5.1 U1.6 U1.7 | length 372.1
  Top Layer w10: U1.7@1036.51,1088.5 U1.6@1036.51,1038.5 1105.6,1038.5 1276.87,867.23 R5.1@1276.87,856.4
NetR6_1: R6.1 RXD.1 | length 543.7
  Top Layer w10: RXD.1@1416.93,1989.7 1416.93,2000.53 1447.12,2030.71 1519.7,2030.71 1597.61,1952.81 R6.1@1597.61,1645.39
NetR7_1: R7.1 TXD.1 | length 191.7
  Top Layer w10: TXD.1@1416.73,1836.2 1418.98,1833.95 R7.1@1418.98,1645.39
NetT1_1: T1.1 U1.1 | length 526.7
  Top Layer w10: U1.1@800.29,1138.5 818.9,1138.5 843.4,1163 1063.21,1163 1066.91,1159.3 1162.89,1159.3 1195.88,1126.31 1218.81,1126.31 1269.7,1075.43 T1.1@1269.7,1064.6
PA0: J1.3 U3.78 | length 1551.5
  Bottom Layer w10: U3.78@1874.72,1275.38 1874.72,1377.3 1788.65,1463.37 1788.65,1691.87 1803.15,1706.37 2578.81,1706.37 2717.82,1845.38 J1.3@2824.41,1845.38
PA1: J1.4 U3.77 | length 1981.6
  Top Layer w10: v1(1671.65,1338.37) 1692.15,1358.87 1692.15,1778.37 v1(1710.15,1796.37)
  Bottom Layer w10: v1(1671.65,1338.37) 1830.15,1338.37 1854.72,1313.8 U3.77@1854.72,1275.38 ; v1(1710.15,1796.37) 2602.15,1796.37 2701.15,1895.37 2874.42,1895.37 J1.4@2924.41,1845.38
PA2: J1.5 U3.76 | length 2527.3
  Top Layer w10: v1(1575.15,1405.37) 1551.65,1405.37 1528.15,1428.87 1528.15,1581.87 1545.65,1599.37 1657.15,1599.56 1657.15,1968.85 1767.2,2078.9 2683.4,2078.9 2731,2031.3 2731,1788.79 2774.41,1745.38 J1.5@2824.41,1745.38
  Bottom Layer w10: v1(1575.15,1405.37) 1652.15,1328.37 1670.19,1301.37 1812.72,1301.37 1834.72,1279.37 U3.76@1834.72,1275.38
PA3: J1.6 U3.75 | length 2756.3
  Top Layer w10: v1(1459.15,1400.37) 1504.15,1445.37 1504.15,1598.71 1520.65,1615.21 1638.15,1615.21 1639.55,1616.61 1639.55,1997.27 1750.08,2107.8 2816.9,2107.8 2869.2,2055.5 2869.2,1800.59 J1.6@2924.41,1745.38
  Bottom Layer w10: v1(1459.15,1400.37) 1611.22,1248.3 1686.14,1248.3 1730.07,1204.37 1730.07,1197.38 U3.75@1756.72,1197.38
PA4: J1.7 U3.74 | length 1521.9
  Top Layer w10: v1(1708.15,1184.38) 1708.15,1440.37 v1(1865.15,1597.37)
  Bottom Layer w10: v1(1708.15,1184.38) 1715.15,1177.38 U3.74@1756.72,1177.38 ; v1(1865.15,1597.37) 1974.15,1597.37 1990.15,1581.37 2560.8,1581.37 2624.81,1645.38 J1.7@2824.41,1645.38
PA5: J1.8 U3.73 | length 1756.3
  Top Layer w10: v1(1683.15,1157.38) 1683.15,1119.87 1695.65,1107.37 1733.15,1107.37 1753.65,1127.87 1753.65,1417.28 1835.39,1499.01 v1(1835.39,1503.51)
  Bottom Layer w10: v1(1683.15,1157.38) U3.73@1756.72,1157.38 ; v1(1835.39,1503.51) 1835.39,1505.01 1899.74,1569.37 1955.65,1569.37 1959.15,1565.87 2578.65,1565.87 2614.15,1601.37 2880.4,1601.37 J1.8@2924.41,1645.38
PA6: J1.9 U3.72 | length 1512.3
  Top Layer w10: v1(1706.65,1129.37) 1738.15,1160.87 1738.15,1445.37 1840.65,1547.87 v1(1908.65,1547.87)
  Bottom Layer w10: v1(1706.65,1129.37) 1715.66,1138.38 U3.72@1756.72,1138.38 ; v1(1908.65,1547.87) 1910.48,1549.7 2161.41,1549.7 J1.9@2824.41,1545.38
PA7: J1.10 U3.71 | length 1635.8
  Top Layer w10: v1(2188.15,1004.87) 2200.15,1016.87 2265.51,1016.87 2284.5,997.88 2380.68,997.88 2391.92,1009.12 2644.74,1009.12 2759.84,1124.22 2759.84,1153.57 2795.65,1189.37 2848.91,1189.37 2868.15,1208.61 2868.15,1489.12 J1.10@2924.41,1545.38
  Bottom Layer w10: U3.71@1756.72,1118.38 1816.15,1118.38 1929.66,1004.87 v1(2188.15,1004.87)
PB0: J1.34 U3.19 | length 1145.9
  Top Layer w10: v1(2339.65,729.27) 2339.65,450.87 v1(2423.15,367.37)
  Bottom Layer w10: v1(2339.65,729.27) 2295.65,773.27 2295.65,800.25 2337.67,842.27 U3.19@2386.68,842.27 ; v1(2423.15,367.37) 2495.15,295.37 2874.4,295.37 J1.34@2924.41,345.38
PB1: ICSP1.3 J1.33 U1.5 U3.20 | length 3390.2
  Top Layer w10: U1.5@1036.51,988.5 1131.15,988.5 1234.8,884.85 1234.8,789.02 1157.2,711.42 1157.2,363.32 1324.15,196.37 1563.07,196.37 ICSP1.3@1605.1,238.4 1697.07,330.37 2150.15,330.37 2221.15,401.37 2221.15,507.37 2230.15,516.37 2230.15,720.92 2263.6,754.37 2263.6,764.82 2326.15,827.37 2371.15,827.37 2394.15,804.37 2394.15,775.64 2467.15,702.64 ; v1(2467.15,810.09) 2467.15,702.64 ; J1.33@2824.41,345.38 2467.15,702.64
  Bottom Layer w10: U3.20@2386.68,822.59 2454.65,822.59 v1(2467.15,810.09)
PB2: ICSP1.4 J1.32 U3.21 | length 2112.1
  Top Layer w10: v1(2342.15,805.37) 2366.15,781.37 2366.15,517.37 v1(2494.15,389.37)
  Bottom Layer w10: ICSP1.4@1505.1,238.4 1547.13,196.37 2120.65,196.37 2137.97,213.69 2137.97,295.19 2158.15,315.37 2288.13,315.37 2362.13,389.37 v1(2494.15,389.37) 2868.4,389.37 J1.32@2924.41,445.38 ; v1(2342.15,805.37) 2344.62,802.9 U3.21@2386.68,802.9
PB3: ICSP1.1 J1.31 U3.22 | length 3254.7
  Top Layer w10: v1(2317.8,783.22) 2317.8,438.72 2467.64,288.88 2832.26,288.88 2867.91,324.53 2867.91,401.88 J1.31@2824.41,445.38
  Bottom Layer w10: ICSP1.1@1605.1,138.4 1605.1,108.37 2987.42,108.37 3068.15,189.1 3068.15,466.87 3045.65,489.37 2902.65,489.37 2858.66,445.38 J1.31@2824.41,445.38 ; v1(2317.8,783.22) U3.22@2386.68,783.22
PB4: J1.52 U3.23 | length 958.7
  Top Layer w10: v1(2573.15,796.37) 2949.9,796.37 2980.15,766.12 2980.15,489.64 J1.52@3024.41,445.38
  Bottom Layer w10: U3.23@2386.68,763.53 2540.31,763.53 v1(2573.15,796.37)